# Altium PCB PCB.PcbDoc (part 1 of 2)
Units mm, origin at the board's own origin, x right, y up, seen from the top; angles counter-clockwise.
Board outline 23.1 x 50.44 mm, 2 copper layers (Top Layer, Bottom Layer), stack 1.671 mm thick; 126 components, 44 nets, 357 pads, 87 vias.
Unrouted connection lines stored in the file: 3.
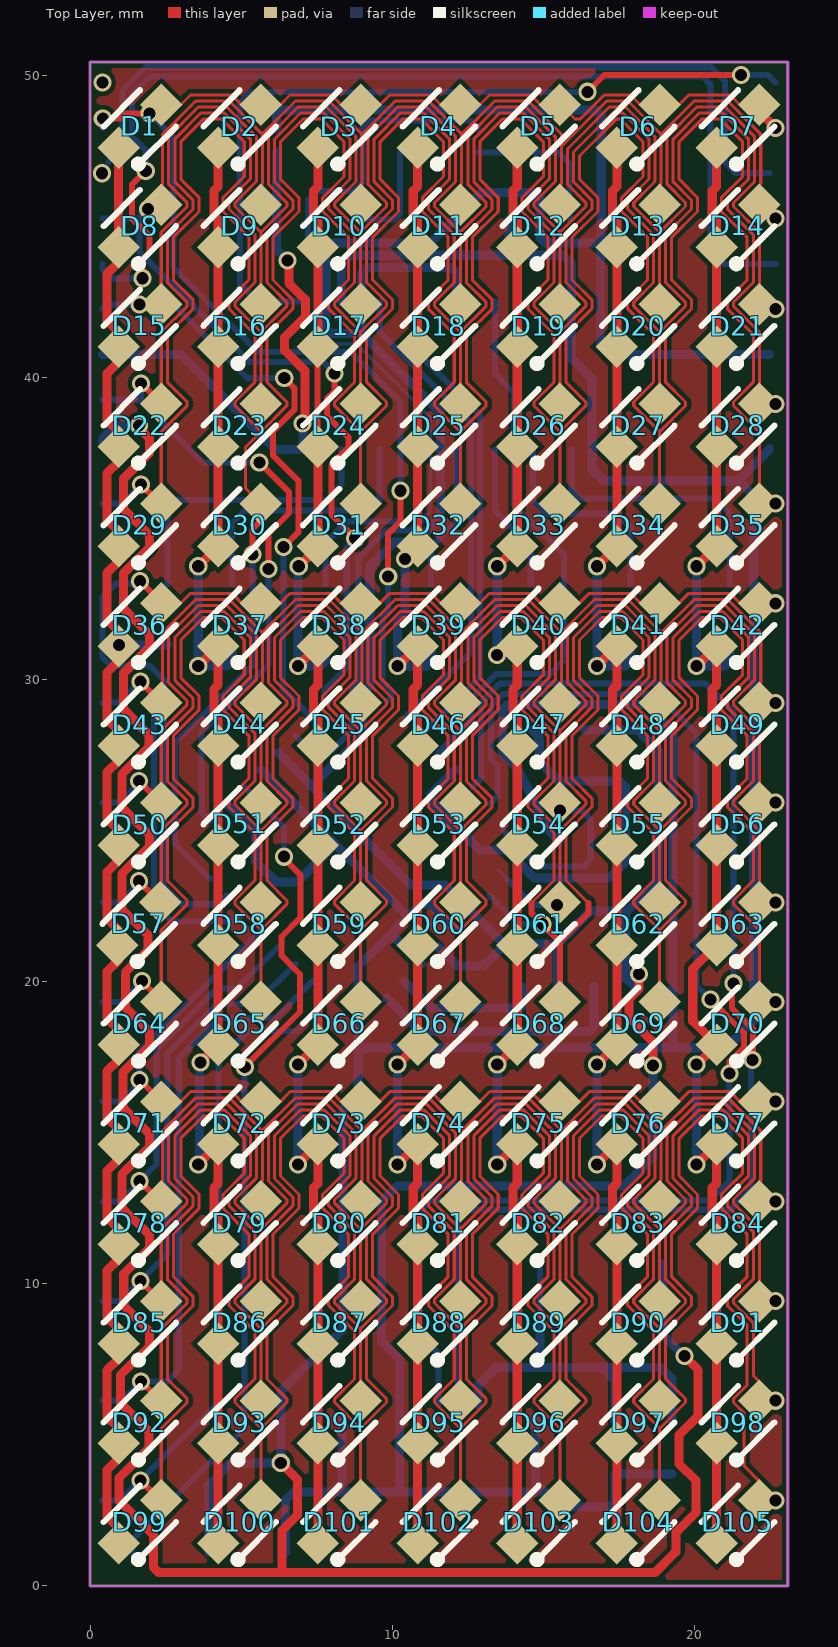
[diagram p0: Top Layer view]
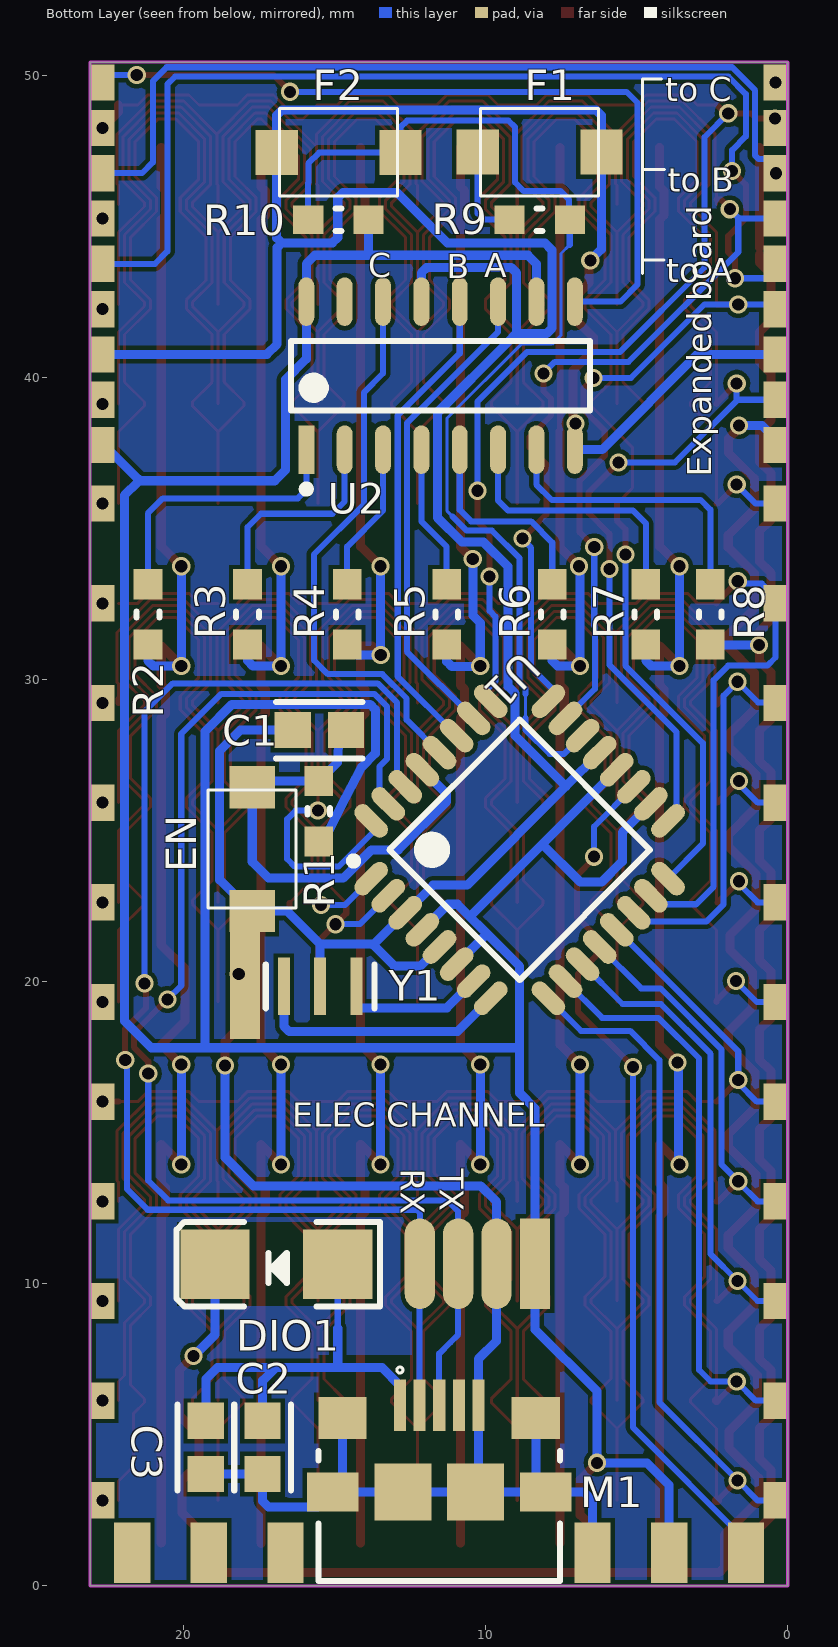
[diagram p1: Bottom Layer view, seen from below]
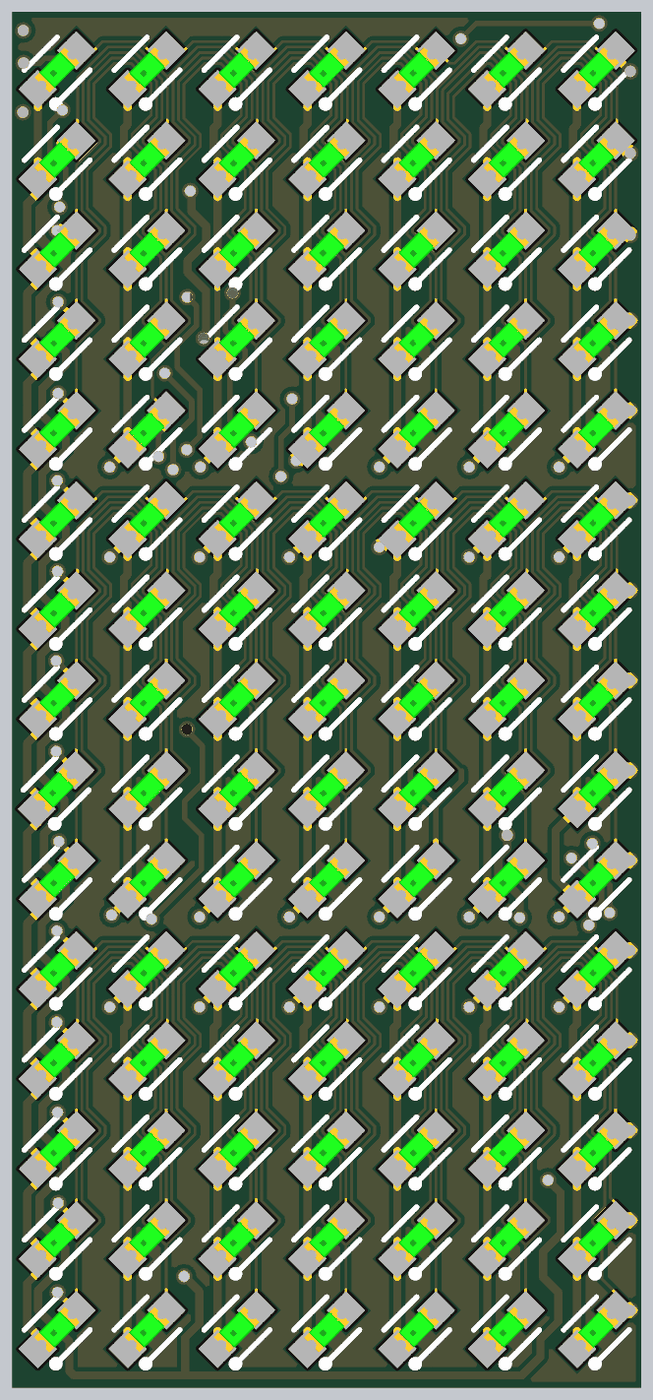
[diagram p3: 3D render of the assembled board from above, using the file's embedded part models]
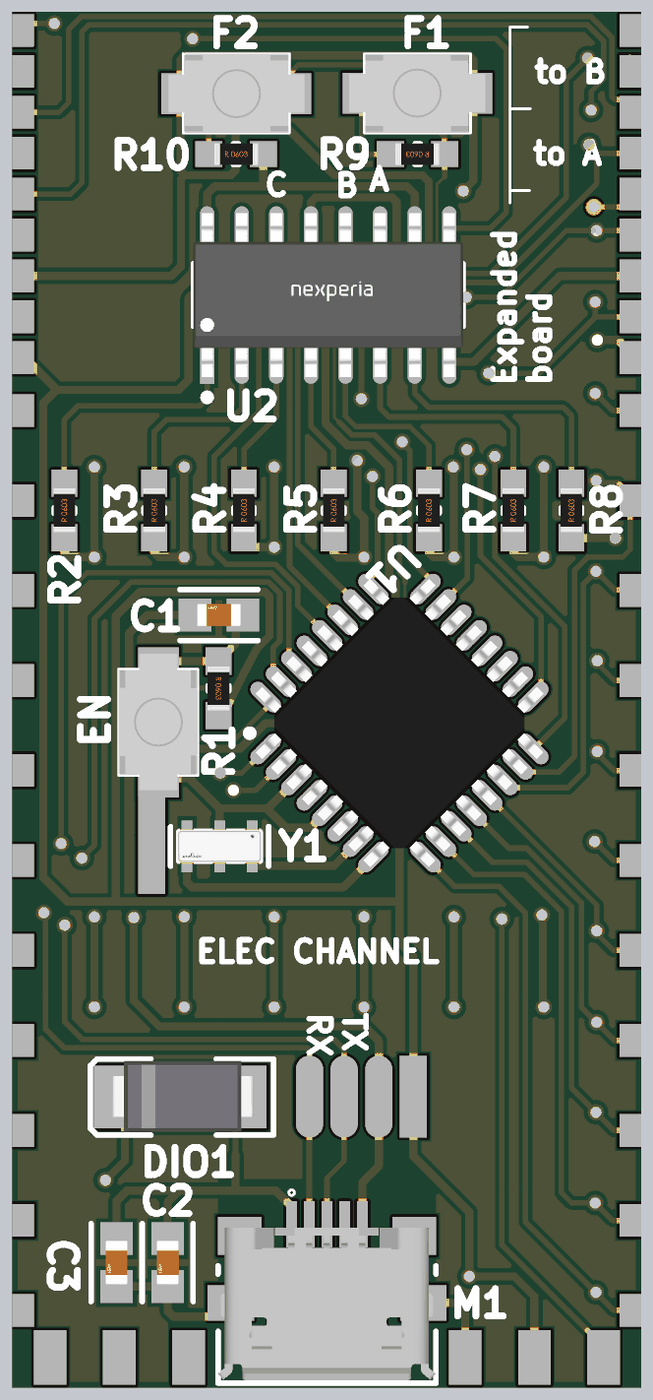
[diagram p4: 3D render of the assembled board from below, using the file's embedded part models]

## Layer stack, top to bottom
Top Solder: solder mask 0.0102, Solder Resist, Dk 3.5
Top Layer: signal copper 0.0356
Dielectric 1: dielectric 1.6, FR-4, Dk 4.8
Bottom Layer: signal copper 0.0356
Bottom Solder: solder mask 0.0102, Solder Resist, Dk 3.5

## Board outline
0,0 0,50.443 23.097,50.443 23.097,0

## Design rules (kind name [scope] priority, off if disabled: settings)
Clearance [All] p1: gap=0.15 ignorepadtopadclearanceinfootprint=FALSE
PolygonConnect [All] p1: connectstyle=Relief reliefconductorwidth=0.254 reliefentries=4 polygonreliefangle="90 Angle" airgapwidth=0.254
RoomDefinition Sheet1 [InComponentClass('Sheet1')] p1: confinementstyle=ConfineIn formatcopy=TRUE lockcomponents=FALSE outline 89.091,-111.853 240.729,-111.853 240.729,-99.153 89.091,-99.153
RoutingCorners [All] p1: cornerstyle=45-Degree minsetback=2 maxsetback=2
RoutingVias [All] p1: holewidth=0.4 width=0.6 viastyle="Through Hole" minholewidth=0.4 minwidth=0.6 maxholewidth=0.4 maxwidth=0.6
SolderMaskExpansion [All] p1: expansion=0.102 istentingtop=FALSE
Width [All] p1: maxlimit=0.5 minlimit=0.1 preferedwidth=0.3
29 further rules are at their usual default settings.

## Components (designator, comment, footprint, x,y, rotation, side; value= is the part's Value field where it differs from the comment)
C1 "0.1uF" Cap_0603_A 15.508,28.329 r0 bottom
C2 "0.1uF" Cap_0603_A 17.387,4.58 r270 bottom
C3 "0.1uF" Cap_0603_A 19.267,4.58 r270 bottom
D1 "Led" "LED 0603" 1.663,48.364 r45 top
D2 "Led" "LED 0603" 4.963,48.364 r45 top
D3 "Led" "LED 0603" 8.263,48.364 r45 top
D4 "Led" "LED 0603" 11.563,48.364 r45 top
D5 "Led" "LED 0603" 14.863,48.364 r45 top
D6 "Led" "LED 0603" 18.163,48.364 r45 top
D7 "Led" "LED 0603" 21.463,48.364 r45 top
D8 "Led" "LED 0603" 1.663,45.064 r45 top
D9 "Led" "LED 0603" 4.963,45.064 r45 top
D10 "Led" "LED 0603" 8.263,45.064 r45 top
D11 "Led" "LED 0603" 11.563,45.064 r45 top
D12 "Led" "LED 0603" 14.863,45.064 r45 top
D13 "Led" "LED 0603" 18.163,45.064 r45 top
D14 "Led" "LED 0603" 21.463,45.064 r45 top
D15 "Led" "LED 0603" 1.663,41.764 r45 top
D16 "Led" "LED 0603" 4.963,41.764 r45 top
D17 "Led" "LED 0603" 8.263,41.764 r45 top
D18 "Led" "LED 0603" 11.563,41.764 r45 top
D19 "Led" "LED 0603" 14.863,41.764 r45 top
D20 "Led" "LED 0603" 18.163,41.764 r45 top
D21 "Led" "LED 0603" 21.463,41.764 r45 top
D22 "Led" "LED 0603" 1.663,38.464 r45 top
D23 "Led" "LED 0603" 4.963,38.464 r45 top
D24 "Led" "LED 0603" 8.263,38.464 r45 top
D25 "Led" "LED 0603" 11.563,38.464 r45 top
D26 "Led" "LED 0603" 14.863,38.464 r45 top
D27 "Led" "LED 0603" 18.163,38.464 r45 top
D28 "Led" "LED 0603" 21.463,38.464 r45 top
D29 "Led" "LED 0603" 1.663,35.164 r45 top
D30 "Led" "LED 0603" 4.963,35.164 r45 top
D31 "Led" "LED 0603" 8.263,35.164 r45 top
D32 "Led" "LED 0603" 11.563,35.164 r45 top
D33 "Led" "LED 0603" 14.863,35.164 r45 top
D34 "Led" "LED 0603" 18.163,35.164 r45 top
D35 "Led" "LED 0603" 21.463,35.164 r45 top
D36 "Led" "LED 0603" 1.663,31.864 r45 top
D37 "Led" "LED 0603" 4.963,31.864 r45 top
D38 "Led" "LED 0603" 8.263,31.864 r45 top
D39 "Led" "LED 0603" 11.563,31.864 r45 top
D40 "Led" "LED 0603" 14.863,31.864 r45 top
D41 "Led" "LED 0603" 18.163,31.864 r45 top
D42 "Led" "LED 0603" 21.463,31.864 r45 top
D43 "Led" "LED 0603" 1.663,28.564 r45 top
D44 "Led" "LED 0603" 4.963,28.564 r45 top
D45 "Led" "LED 0603" 8.263,28.564 r45 top
D46 "Led" "LED 0603" 11.563,28.564 r45 top
D47 "Led" "LED 0603" 14.863,28.564 r45 top
D48 "Led" "LED 0603" 18.163,28.564 r45 top
D49 "Led" "LED 0603" 21.463,28.564 r45 top
D50 "Led" "LED 0603" 1.663,25.264 r45 top
D51 "Led" "LED 0603" 4.963,25.264 r45 top
D52 "Led" "LED 0603" 8.263,25.264 r45 top
D53 "Led" "LED 0603" 11.563,25.264 r45 top
D54 "Led" "LED 0603" 14.863,25.264 r45 top
D55 "Led" "LED 0603" 18.163,25.264 r45 top
D56 "Led" "LED 0603" 21.463,25.264 r45 top
D57 "Led" "LED 0603" 1.624,21.964 r45 top
D58 "Led" "LED 0603" 4.963,21.964 r45 top
D59 "Led" "LED 0603" 8.263,21.964 r45 top
D60 "Led" "LED 0603" 11.563,21.964 r45 top
D61 "Led" "LED 0603" 14.863,21.964 r45 top
D62 "Led" "LED 0603" 18.163,21.964 r45 top
D63 "Led" "LED 0603" 21.463,21.964 r45 top
D64 "Led" "LED 0603" 1.663,18.664 r45 top
D65 "Led" "LED 0603" 4.963,18.664 r45 top
D66 "Led" "LED 0603" 8.263,18.664 r45 top
D67 "Led" "LED 0603" 11.563,18.664 r45 top
D68 "Led" "LED 0603" 14.863,18.664 r45 top
D69 "Led" "LED 0603" 18.163,18.664 r45 top
D70 "Led" "LED 0603" 21.463,18.664 r45 top
D71 "Led" "LED 0603" 1.663,15.364 r45 top
D72 "Led" "LED 0603" 4.963,15.364 r45 top
D73 "Led" "LED 0603" 8.263,15.364 r45 top
D74 "Led" "LED 0603" 11.563,15.364 r45 top
D75 "Led" "LED 0603" 14.863,15.364 r45 top
D76 "Led" "LED 0603" 18.163,15.364 r45 top
D77 "Led" "LED 0603" 21.463,15.364 r45 top
D78 "Led" "LED 0603" 1.663,12.064 r45 top
D79 "Led" "LED 0603" 4.963,12.064 r45 top
D80 "Led" "LED 0603" 8.263,12.064 r45 top
D81 "Led" "LED 0603" 11.563,12.064 r45 top
D82 "Led" "LED 0603" 14.863,12.064 r45 top
D83 "Led" "LED 0603" 18.163,12.064 r45 top
D84 "Led" "LED 0603" 21.463,12.064 r45 top
D85 "Led" "LED 0603" 1.663,8.764 r45 top
D86 "Led" "LED 0603" 4.963,8.764 r45 top
D87 "Led" "LED 0603" 8.263,8.764 r45 top
D88 "Led" "LED 0603" 11.563,8.764 r45 top
D89 "Led" "LED 0603" 14.863,8.764 r45 top
D90 "Led" "LED 0603" 18.163,8.764 r45 top
D91 "Led" "LED 0603" 21.463,8.764 r45 top
D92 "Led" "LED 0603" 1.663,5.464 r45 top
D93 "Led" "LED 0603" 4.963,5.464 r45 top
D94 "Led" "LED 0603" 8.263,5.464 r45 top
D95 "Led" "LED 0603" 11.563,5.464 r45 top
D96 "Led" "LED 0603" 14.863,5.464 r45 top
D97 "Led" "LED 0603" 18.163,5.464 r45 top
D98 "Led" "LED 0603" 21.463,5.464 r45 top
D99 "Led" "LED 0603" 1.663,2.164 r45 top
D100 "Led" "LED 0603" 4.963,2.164 r45 top
D101 "Led" "LED 0603" 8.263,2.164 r45 top
D102 "Led" "LED 0603" 11.563,2.164 r45 top
D103 "Led" "LED 0603" 14.863,2.164 r45 top
D104 "Led" "LED 0603" 18.163,2.164 r45 top
D105 "Led" "LED 0603" 21.463,2.164 r45 top
DIO1 "Diode SMD" DIO-SMD-106 16.93,10.651 r180 bottom value=1N5007
EN "BUTTON" "BUTTON 3x4mm 2 Pin" 17.768,24.392 r90 bottom
F1 "BUTTON" "BUTTON 3x4mm 2 Pin" 8.217,47.431 r0 bottom
F2 "BUTTON" "BUTTON 3x4mm 2 Pin" 14.872,47.491 r180 bottom
M1 "Micro-USB" "2.0 5 PIN SMD" 11.088,3.784 r180 bottom
R1 "10k" Res_0603 15.533,25.612 r270 bottom
R2 "10k" Res_0603 21.172,32.19 r90 bottom
R3 "10k" Res_0603 17.875,32.19 r90 bottom
R4 "10k" Res_0603 14.578,32.19 r90 bottom
R5 "10k" Res_0603 11.281,32.19 r90 bottom
R6 "10k" Res_0603 7.786,32.19 r90 bottom
R7 "10k" Res_0603 4.687,32.19 r90 bottom
R8 "10k" Res_0603 2.554,32.19 r90 bottom
R9 "10k" Res_0603 8.243,45.24 r0 bottom
R10 "10k" Res_0603 14.847,45.22 r180 bottom
U1 "ATmega328-AU" TQFP32 8.878,24.367 r135 bottom
U2 "74HC595D,118" FP-SOT109-1-IPC_C 11.494,40.064 r90 bottom
Y1 "CSTNE16M0V530000R0" FP-CSTNE16M0V530000R0-MFG 15.482,19.846 r180 bottom

## Footprints (in the part's own frame and the unit in brackets; to place one, negate y for a bottom-side part, rotate by r counter-clockwise, add the part's x,y. Pads: shape width x height; smd on the part's side, far side on the other; paste and mask are expansions set on the pad)
"2.0 5 PIN SMD" [mm] "ID 1981568-1"
  rect 0.4x1.7 smd: 1(-1.751,2.198) 2(-1.101,2.198) 3(-0.451,2.198) 4(0.199,2.198) 5(0.849,2.198)
  rect 1.6x1.4 smd: 6(-3.651,1.773) 7(2.749,1.773)
  rect 1.7x1.3 smd: 8(-3.98,-0.68) 9(3.08,-0.68)
  rect 1.9x1.9 smd: 10(-1.651,-0.677) 11(0.749,-0.677)
  silkscreen extent -4.45,-3.63 3.55,3.46, body extent -4.46,-3.52 3.54,2.08, height 2.94
"BUTTON 3x4mm 2 Pin" [mm]
  rect 1.4x1.5 smd: 1(-2.05,-0.04) 2(2.05,-0.04)
  silkscreen extent -1.95,-1.48 1.95,1.42, body extent -2.49,-1.48 2.51,1.42, height 2
Cap_0603_A [mm]
  rect 1.2x1.2 smd paste+0 mask+0: 1(-0.88,0) 2(0.88,0)
  silkscreen extent -1.43,-0.93 1.43,0.93, body extent -0.8,-0.41 0.8,0.4, height 0.9
DIO-SMD-106 [mil]
  rect 90x90.55 smd: 1(80,0) 2(-80,0)
  silkscreen extent -130,-55 135,55, body extent -99,-50 106,52, height 95
FP-CSTNE16M0V530000R0-MFG [mm]
  rect 0.4x1.9 smd paste+0 mask+0: 1(1.2,0) 2(0,0) 3(-1.2,0)
  silkscreen extent -1.8,-0.72 1.8,0.72, body extent -1.6,-0.65 1.6,0.65, height 1
FP-SOT109-1-IPC_C [mm]
  rect 1.604x0.528 smd paste+0 mask+0: 1(-2.451,4.445)
  rrect100% 1.604x0.528 smd paste+0 mask+0: 2(-2.451,3.175) 3(-2.451,1.905) 4(-2.451,0.635) 5(-2.451,-0.635) 6(-2.451,-1.905) 7(-2.451,-3.175) 8(-2.451,-4.445) 9(2.451,-4.445) 10(2.451,-3.175) 11(2.451,-1.905) 12(2.451,-0.635) 13(2.451,0.635) 14(2.451,1.905) 15(2.451,3.175) 16(2.451,4.445)
  silkscreen extent -3.88,-4.95 1.15,4.95, body extent -3,-4.95 3,4.95, height 1.75
"LED 0603" [mm]
  rect 1x1 smd: 1(-1.04,-0.02) 2(0.96,-0.02)
  silkscreen extent -1.08,-0.99 0.8,0.82, body extent -1.29,-0.57 1.21,0.53, height 0.25
Res_0603 [mm]
  rect 1x0.95 smd: 1(-1.03,0.01) 2(0.97,0.01)
  silkscreen extent -0.13,-0.37 0.07,0.39, body extent -0.82,-0.39 0.78,0.41, height 0.45
TQFP32 [mm] "Thin QFP, 32-Leads, Body 9x9mm, Pitch 0.8mm, IPC Low Density"
  oval 1.35x0.55 smd: 1(-4.15,2.8) 2(-4.15,2) 3(-4.15,1.2) 4(-4.15,0.4) 5(-4.15,-0.4) 6(-4.15,-1.2) 7(-4.15,-2) 8(-4.15,-2.8) 17(4.15,-2.8) 18(4.15,-2) 19(4.15,-1.2) 20(4.15,-0.4) 21(4.15,0.4) 22(4.15,1.2) 23(4.15,2) 24(4.15,2.8)
  oval 0.55x1.35 smd: 9(-2.8,-4.15) 10(-2,-4.15) 11(-1.2,-4.15) 12(-0.4,-4.15) 13(0.4,-4.15) 14(1.2,-4.15) 15(2,-4.15) 16(2.8,-4.15) 25(2.8,4.15) 26(2,4.15) 27(1.2,4.15) 28(0.4,4.15) 29(-0.4,4.15) 30(-1.2,4.15) 31(-2,4.15) 32(-2.8,4.15)
  silkscreen extent -4.27,-3.05 3.05,3.75, body extent -4.5,-4.5 4.5,4.5, height 1.4

## Part data
C1 C2 C3: library part Capacitor, "General Purpose Ceramic Capacitor, 0603, 1nF, 10%, X7R, 15%, 50V", Capacitance=1nF, Case Code (Imperial)=0603, Case Code (Metric)=1608, Dielectric=X7R, Dielectric Material=Ceramic, Max Operating Temperature=125°C, Min Operating Temperature=-55°C, Package Quantity=4000, Tolerance=10%, Voltage=50V, Case/Package=0603, Construction=Flat, Contact Plating=Tin, Depth=0.81mm, Height=0.9mm, Lead Free="Lead Free", Length=1.6mm, Mount="Surface Mount", Number of Pins=2, Packaging="Tape and Reel", Radiation Hardening=No, REACH SVHC="No SVHC", RoHS Compliant=Yes, Series=-, Termination=SMD/SMT, Thickness=0.035inch, Voltage Rating=50V, Voltage Rating (DC)=50V, Weight=7.1E-05oz, Width=0.032inch
DIO1: "Default Diode", Code - JEDEC=DO-214-AB, Published=8-Jun-2000, Publisher="Altium Limited", Revision="July-2002: Re-released for DXP Platform."
EN F1 F2: library part "BUTTON 4 PIN", Case/Package=SOIC, Frequency=100kHz, High Level Output Current=-200mA, Low Level Output Current=200mA, Max Operating Temperature=70°C, Max Supply Voltage=16V, Min Operating Temperature=0°C, Min Supply Voltage=4.5V, Operating Supply Current=10mA, Package Quantity=2500, Quiescent Current=15mA, Contact Plating=Gold, Height=1.58mm, Lead Free="Lead Free", Length=4.9mm, Mount="Surface Mount", Number of Pins=8, Number of Timers/Counters=1, Packaging="Tape and Reel", Radiation Hardening=No, REACH SVHC="No SVHC", Weight=0.002561oz, Width=3.91mm
R1 R2 R3 R4 R5 R6 R7 R8 R9 R10: library part Resistor
U1: "8-bit AVR Microcontroller, 32KB Flash, 1KB EEPROM, 2KB SRAM, 32-pin TQFP, Industrial Grade (-40°C to 85°C)", Supplier Part Number 1=ATMEGA328-AU-ND, Code_JEDEC=MS-026-ABA, ComponentLink1Description="Manufacturer Link", ComponentLink1URL=http://www.atmel.com/products/avr/default.asp?, ComponentLink2Description="ATmega48A/48PA/88A/88PA/168A/168PA/328/328P Datasheet", ComponentLink2URL=http://www.atmel.com/dyn/resources/prod_documents/8271.pdf, ComponentLink3Description="ATmega48A/48PA/88A/88PA/168A/168PA/328/328P Summary", ComponentLink3URL=http://www.atmel.com/dyn/resources/prod_documents/8271S.pdf, ComponentLink4Description="Atmel.com Home", ComponentLink4URL=http://www.atmel.com, DatasheetVersion="revA, Jan-2010", PackageDescription="32-Lead, 7x7x1.0 mm Body, 0.8mm Lead Pitch, Thin Profile Plastic Quad Flat Package (TQFP)", PackageReference=32A, PackageVersion="revB, Oct-2001", Published=1-Apr-2010, Publisher="Altium Limited", Supplier 1=Digi-Key, Supplier 2=Mouser, Supplier Part Number 2=556-ATMEGA328-AU
U2: library part CMP-14351-000006-1, "IC SHIFT REGISTER 8BIT 16SOIC", RoHS Compliant=Yes
Y1: library part CMP-06054-000001-1, "CERAMIC RES 16.0000MHZ 15PF SMD", Frequency=16MHz, Load Capacitance=15pF, Manufacturer=Murata, Package=0, Temperature="-40°C to +85°C", Temperature Range High=+85°C, Temperature Range Low=-40°C, Tolerance=0.5%, Automotive=No, Category=Crys, ComponentLink2Description=Datasheet, ComponentLink2URL=https://www.murata.com/en-sg/products/productdata/8801162231838/SPEC-CSTNE16M0V530000R0.pdf?1545967809000, Device Class L1="Passive Components", Device Class L2="Crystals / Oscillators", Device Class L3=Crystals, Digikey Description="CERAMIC RES 16.0000MHZ 15PF SMD", Esr=40Ω, Height=1mm, Lead Free=Yes, Manufacturer Part Number=CSTNE16M0V530000R0, Mouser Description="Ceramic Resonator 16MHz ±0.5% (Tol) ±0.3% (Stability) 15pF 40Ohm 3-Pin CSMD T/R", Octopart=https://octopart.com/cstne16m0v530000r0-murata-91406924, RoHS=TRUE, Series=CSTNE_V, Stability=0.3%

## Free pads (board coordinates)
  rect 0.8x1.2 smd far side: ""(0.405,9.428) ""(0.405,25.928) ""(0.405,29.228) ""(0.405,6.128) ""(0.405,12.728) ""(0.405,16.028) ""(0.405,19.328) ""(0.405,22.628) ""(0.405,32.528) ""(0.405,35.828) ""(0.405,37.767) ""(0.405,39.267) ""(0.405,40.767) ""(0.405,42.267) ""(0.405,43.767) ""(0.405,45.267) ""(0.405,46.767) ""(0.405,48.267) ""(0.405,49.767) ""(0.405,2.828) ""(22.693,2.828) ""(22.693,6.128) ""(22.693,12.728) ""(22.693,16.028) ""(22.693,19.328) ""(22.693,22.628) ""(22.693,32.528) ""(22.693,35.828) ""(22.693,37.767) ""(22.693,39.267) ""(22.693,40.767) ""(22.693,42.267) ""(22.693,43.767) ""(22.693,45.267) ""(22.693,46.767) ""(22.693,48.267) ""(22.693,49.767) ""(22.693,9.428) ""(22.693,25.928) ""(22.693,29.228)
  rect 1.2x2 smd far side: ""(1.385,1.101) ""(3.925,1.101) ""(6.465,1.101) ""(16.625,1.101) ""(19.165,1.101) ""(21.705,1.101)
  rect 1x3 smd far side: ""(8.37,10.665)
  oval 1x3 smd far side: ""(9.64,10.665) ""(10.91,10.665) ""(12.18,10.665)
  rect 1x3.6 smd far side: ""(17.971,19.897)

## Via types
v1: diameter 0.6, hole 0.4, Top Layer to Bottom Layer, tented both sides, 86 vias
v2: diameter 0.6, hole 0.4, Top Layer to Bottom Layer, tented top, 1 vias

## Nets (pads, with @x,y where several pads share a name; then routed paths per layer and width w, separated by ;. In a path a pad name is that pad's centre, name@x,y a point inside that pad or via, vN(x,y) a via of type N, cw(c..) or ccw(c..) an arc to the next point about the centre after c; other vN are vias at no path point)
+5: DIO1.2 pad.@0.405,37.767 pad.@3.925,1.101 pad.@8.37,10.665 pad.@22.693,37.767 R1.2 R10.2 U1.4 U1.6 U1.18 U1.20 U2.10 U2.16 | length 197.8
  Top Layer w0.3: v1(1.614,38.413) 1.614,38.332 1.968,37.978 1.968,37.513 1.106,36.651 1.106,35.645 1.969,34.781 1.969,34.382 1.106,33.518 1.106,32.352 1.969,31.488 1.969,31.082 1.106,30.218 1.106,29.022 1.944,28.184 1.944,27.756 1.055,26.867 1.055,25.77 1.969,24.856 1.969,24.482 1.055,23.567 1.055,22.405 1.919,21.541 1.919,21.065 1.165,20.312 1.165,19.151 1.969,18.347 1.969,17.882 1.089,17.001 1.089,15.827 1.969,14.947 1.969,14.537 1.055,13.623 1.055,12.522 1.969,11.608 1.969,11.184 1.115,10.33 1.115,9.271 1.969,8.416 1.969,7.933 1.004,6.968 1.004,6.054 1.944,5.114 1.944,4.555 0.953,3.564 0.953,2.828 2.096,1.685 2.096,0.616 2.272,0.44 6.349,0.44 ; v1(6.313,4.072) 6.872,3.514 6.872,2.345 6.349,1.822 6.349,0.44 ; v1(19.673,7.603) 20.13,7.146 20.13,5.622 19.495,4.987 19.495,4.047 20.054,3.488 20.054,2.421 19.394,1.761 19.394,1.126 18.708,0.44 6.349,0.44
  Bottom Layer w0.3: pad.@0.405,37.767 0.405,37.967 0.851,38.413 v1(1.614,38.413) ; pad.@3.925,1.101 3.925,3.336 4.662,4.072 v1(6.313,4.072) 6.313,6.435 8.37,8.492 pad.@8.37,10.665 8.37,15.807 8.878,16.315 8.878,17.814 ; U1.18@4.53,25.887 5.475,24.942 5.475,23.986 6.16,23.3 6.864,23.3 8.122,24.558 ; U1.20@5.661,27.019 8.122,24.558 ; U2.10@8.319,42.515 8.319,43.767 8.604,44.052 13.892,44.052 ; 10.084,21.464 U1.6@10.964,20.584 ; U1.4@12.096,21.715 11.247,22.564 10.936,22.564 10.51,22.138 ; R10.2@13.877,45.23 13.877,44.067 13.892,44.052 ; R1.2@15.523,24.642 15.198,24.992 14.642,26.097 14.111,27.102 13.653,27.56 13.653,29.004 13.829,29.179 18.399,29.179 19.292,28.286 19.292,17.814 ; DIO1.2@18.962,10.651 18.962,8.314 v1(19.673,7.603) ; pad.@22.493,37.628 21.502,36.638 21.502,36.584 ; 8.122,24.558 10.51,22.17 10.51,22.138 ; 8.878,17.814 8.878,20.506 10.084,21.712 10.51,22.138 ; 8.878,17.814 19.292,17.814 ; 13.892,44.052 15.655,44.052 15.939,43.767 U2.16@15.939,42.515 15.939,40.623 16.625,39.937 16.625,36.943 16.983,36.584 21.502,36.584 ; 19.292,17.814 21.07,17.814 21.959,18.703 21.959,36.102 21.502,36.559 21.502,36.584
C1: D1.1 D8.1 D15.1 D22.1 D29.1 D36.1 D43.1 D50.1 D57.1 D64.1 D71.1 D78.1 D85.1 D92.1 D99.1 R8.1 | length 51.8
  Top Layer w0.3: D99.1@0.941,1.414 0.941,1.909 0.553,2.297 0.553,3.831 0.941,4.219 D92.1@0.941,4.714 0.941,5.209 0.553,5.597 0.553,7.131 0.941,7.519 D85.1@0.941,8.014 0.941,8.509 0.553,8.897 0.553,10.431 0.941,10.819 D78.1@0.941,11.314 0.941,11.809 0.553,12.197 0.553,13.731 0.941,14.119 D71.1@0.941,14.614 0.941,15.109 0.553,15.497 0.553,17.031 0.941,17.419 D64.1@0.941,17.914 0.941,18.409 0.553,18.797 0.553,20.331 0.941,20.719 0.941,21.214 0.941,21.709 0.553,22.097 0.553,23.631 0.941,24.019 D50.1@0.941,24.514 0.941,25.009 0.553,25.397 0.553,26.931 0.941,27.319 D43.1@0.941,27.814 0.941,28.309 0.553,28.697 0.553,30.231 0.941,30.619 D36.1@0.941,31.114 ; D8.1@0.941,44.067 0.941,43.819 0.553,43.431 0.553,41.897 0.941,41.509 D15.1@0.941,41.014 0.941,40.519 0.553,40.131 0.553,38.597 0.941,38.209 D22.1@0.941,37.714 0.941,37.219 0.553,36.831 0.553,35.297 0.941,34.909 D29.1@0.941,34.414 0.941,33.919 0.553,33.531 0.553,31.997 0.941,31.609 D36.1@0.941,31.114 ; D8.1@0.941,44.314 D1.1@0.941,47.614 ; v1(0.953,31.149) 0.941,31.137 D36.1@0.941,31.114
  Bottom Layer w0.3: v1(0.953,31.149) 2.552,31.149 R8.1@2.564,31.16
C2: D2.1 D9.1 D16.1 D23.1 D30.1 D37.1 D44.1 D51.1 D58.1 D65.1 D72.1 D79.1 D86.1 D93.1 D100.1 R7.1 | length 52
  Top Layer w0.3: v1(3.58,13.953) D72.1@4.241,14.614 4.241,13.319 4.099,13.176 4.099,12.376 4.241,12.233 D79.1@4.241,11.314 D86.1@4.241,8.014 D93.1@4.241,4.714 D100.1@4.241,1.414 ; v1(3.58,30.453) D37.1@4.241,31.114 4.241,29.824 4.099,29.681 4.099,28.876 4.241,28.733 D44.1@4.241,27.814 D51.1@4.241,24.514 D58.1@4.241,21.214 D65.1@4.241,17.917 ; v1(3.58,33.755) D30.1@4.239,34.414 ; v1(3.651,17.326) D65.1@4.241,17.914 D65.1@4.241,17.914 ; D30.1@4.241,34.414 D30.1@4.239,34.414 ; D2.1@4.241,47.614 4.241,46.324 4.099,46.181 4.099,45.376 4.241,45.233 D9.1@4.241,44.314 D16.1@4.241,41.014 D23.1@4.241,37.714 4.241,34.417 D30.1@4.239,34.414
  Bottom Layer w0.3: v1(3.58,13.953) 3.616,13.988 3.616,17.291 v1(3.651,17.326) ; v1(3.58,33.755) v1(3.58,30.453) 4.522,30.453 4.697,30.629 R7.1@4.697,31.16
C3: D3.1 D10.1 D17.1 D24.1 D31.1 D38.1 D45.1 D52.1 D59.1 D66.1 D73.1 D80.1 D87.1 D94.1 D101.1 R6.1 | length 52.8
  Top Layer w0.2: D24.1@7.541,37.714 7.541,38.28 7.532,38.289 7.532,40.439 7.541,40.449 D17.1@7.541,41.014
  Top Layer w0.3: v1(6.88,17.255) D66.1@7.539,17.914 ; v1(6.88,13.953) D73.1@7.541,14.614 7.541,13.324 7.399,13.181 7.399,12.376 7.541,12.233 D80.1@7.541,11.314 7.541,10.819 D94.1@7.542,4.714 D101.1@7.541,1.417 ; v1(6.88,30.453) D38.1@7.541,31.114 7.541,29.824 7.399,29.681 7.399,28.876 7.541,28.733 D45.1@7.542,27.814 D52.1@7.541,24.514 D59.1@7.541,21.214 7.541,17.917 D66.1@7.539,17.914 ; v1(6.906,33.755) 7.541,34.39 D31.1@7.541,34.414 7.541,37.724 D24.1@7.541,38.209 ; D66.1@7.541,17.914 D66.1@7.539,17.914 ; D17.1@7.541,40.519 7.541,41.005 D10.1@7.541,44.314 7.541,45.233 7.399,45.376 7.399,46.181 7.541,46.324 D3.1@7.541,47.614 ; D101.1@7.541,1.417 D101.1@7.541,1.414 7.539,1.414 D101.1@7.541,1.417
  Bottom Layer w0.3: v1(6.88,13.953) v1(6.88,17.255) ; v1(6.906,33.755) 6.88,33.729 v1(6.88,30.453) 7.62,30.453 7.796,30.629 R6.1@7.796,31.16
C4: D4.1 D11.1 D18.1 D25.1 D32.1 D39.1 D46.1 D53.1 D60.1 D67.1 D74.1 D81.1 D88.1 D95.1 D102.1 R5.1 | length 83.7
  Top Layer w0.1: v1(10.18,17.255) D67.1@10.839,17.914 ; D102.1@10.842,1.414 10.841,12.375 10.799,12.418 10.799,13.176 10.841,13.219 D74.1@10.841,14.614 ; D67.1@10.841,17.914 D60.1@10.841,21.214 D53.1@10.841,24.514 D46.1@10.841,27.814 10.841,28.875 10.799,28.918 10.799,29.676 10.841,29.719 D39.1@10.841,31.114
  Top Layer w0.3: v1@10.177,17.255 D67.1@10.836,17.914 ; v1(10.18,13.953) D74.1@10.841,14.614 10.841,13.324 10.699,13.181 10.699,12.376 10.841,12.233 10.841,1.417 10.839,1.414 D102.1@10.842,1.414 ; v1(10.18,17.255) D67.1@10.839,17.914 ; v1(10.18,30.453) D39.1@10.841,31.114 10.841,29.824 10.699,29.681 10.699,28.876 10.841,28.733 10.841,17.917 D67.1@10.839,17.914 ; v1(10.428,33.994) 10.841,34.407 D32.1@10.841,34.417 ; D67.1@10.841,17.914 D67.1@10.839,17.914 ; D32.1@10.841,34.414 D25.1@10.841,37.714 D18.1@10.841,41.014 D11.1@10.841,44.314 10.841,45.233 10.699,45.376 10.699,46.181 10.841,46.324 D4.1@10.841,47.614
  Bottom Layer w0.1: v1@10.18,13.953 v1(10.18,17.255)
  Bottom Layer w0.3: v1@10.177,13.953 v1@10.177,17.255 ; v1(10.428,33.994) 10.428,32.129 10.18,31.881 10.18,30.453 10.203,30.43 11.115,30.43 11.291,30.606 R5.1@11.291,31.16
C5: D5.1 D12.1 D19.1 D26.1 D33.1 D40.1 D47.1 D54.1 D61.1 D68.1 D75.1 D82.1 D89.1 D96.1 D103.1 R4.1 | length 81.4
  Top Layer w0.1: v1(13.48,17.255) D68.1@14.139,17.914 ; v1(13.48,33.755) D33.1@14.139,34.414 ; D68.1@14.142,17.914 D47.1@14.142,27.814 14.142,28.875 14.099,28.918 14.099,29.676 14.142,29.719 14.142,29.824 ; D33.1@14.141,34.414 D12.1@14.142,44.314 14.142,45.375 14.099,45.418 14.099,46.176 14.142,46.219 D5.1@14.142,47.614
  Top Layer w0.3: v1(13.476,30.819) 13.771,31.114 D40.1@14.142,31.114 14.142,29.824 13.999,29.681 13.999,28.876 14.142,28.733 D47.1@14.142,27.814 14.142,17.917 14.139,17.914 D68.1@14.142,17.914 ; v1@13.478,17.256 D68.1@14.138,17.916 ; v1(13.48,33.755) D33.1@14.139,34.414 ; v1(13.48,13.953) D75.1@14.142,14.614 14.142,13.319 13.999,13.176 13.999,12.376 14.142,12.233 D82.1@14.142,11.314 D89.1@14.142,8.014 D96.1@14.142,4.714 D103.1@14.142,1.414 ; D33.1@14.141,34.414 D33.1@14.139,34.414 ; D5.1@14.142,47.614 14.142,46.324 13.999,46.181 13.999,45.376 14.142,45.233 D12.1@14.142,44.314 14.142,34.417 D33.1@14.139,34.414
  Bottom Layer w0.1: v1(13.48,13.953) v1(13.48,17.255)
  Bottom Layer w0.3: v1@13.479,13.955 v1@13.479,17.256 ; v1(13.48,33.755) 13.48,30.823 v1(13.476,30.819) 14.263,30.819 14.588,31.144 R4.1@14.588,31.16
C6: D6.1 D13.1 D20.1 D27.1 D34.1 D41.1 D48.1 D55.1 D62.1 D69.1 D76.1 D83.1 D90.1 D97.1 D104.1 R3.1 | length 70.4
  Top Layer w0.1: v1(16.78,33.755) D34.1@17.439,34.414 ; D34.1@17.442,34.414 D27.1@17.442,37.714 D20.1@17.442,41.014 D13.1@17.442,44.314 17.442,45.375 17.399,45.418 17.399,46.176 17.442,46.219 D6.1@17.442,47.614
  Top Layer w0.3: v1@16.777,17.255 D69.1@17.436,17.914 ; v1(16.78,13.953) D76.1@17.442,14.614 17.442,13.324 17.299,13.181 17.299,12.376 17.442,12.233 D83.1@17.442,11.314 D90.1@17.442,8.014 D97.1@17.442,4.714 D104.1@17.442,1.417 ; v1(16.78,17.255) D69.1@17.439,17.914 ; v1(16.78,30.453) D41.1@17.442,31.114 17.442,29.772 ; v1(16.78,33.755) D34.1@17.439,34.414 ; 17.415,29.798 17.299,29.681 17.299,28.876 17.442,28.733 D48.1@17.442,27.814 D55.1@17.442,24.514 D62.1@17.442,21.214 D69.1@17.442,17.917 ; D104.1@17.442,1.409 D104.1@17.442,1.414 ; D34.1@17.442,34.414 D34.1@17.439,34.414 ; D6.1@17.442,47.614 17.442,46.324 17.299,46.181 17.299,45.376 17.442,45.233 D13.1@17.442,44.314 D20.1@17.442,41.014 D27.1@17.442,37.714 17.442,34.417 D34.1@17.439,34.414 ; D69.1@17.439,17.914 D69.1@17.442,17.917 ; D69.1@17.439,17.914 D69.1@17.442,17.914 D69.1@17.442,17.917 ; D104.1@17.442,1.414 D104.1@17.442,1.417 ; D104.1@17.442,1.414 17.439,1.414 D104.1@17.442,1.417
  Bottom Layer w0.1: v1(16.78,13.953) v1(16.78,17.255)
  Bottom Layer w0.3: v1@16.777,13.953 v1@16.777,17.255 ; v1(16.78,33.755) v1(16.78,30.453) 17.709,30.453 17.885,30.629 R3.1@17.885,31.16
C7: D7.1 D14.1 D21.1 D28.1 D35.1 D42.1 D49.1 D56.1 D63.1 D70.1 D77.1 D84.1 D91.1 D98.1 D105.1 R2.1 | length 58
  Top Layer w0.1: 20.742,28.733 20.742,28.875 20.699,28.918 20.699,29.676 20.742,29.719 20.742,29.824
  Top Layer w0.3: v1@20.077,33.755 D35.1@20.736,34.414 ; v1(20.08,17.255) 20.739,17.914 19.953,18.7 19.953,20.425 D63.1@20.742,21.214 D56.1@20.742,24.514 D49.1@20.742,27.814 20.742,28.733 20.599,28.876 20.599,29.681 20.742,29.824 D42.1@20.742,31.114 v1(20.08,30.453) ; v1(20.08,33.755) D35.1@20.739,34.414 ; v1(20.08,13.953) D77.1@20.742,14.614 20.742,13.324 20.599,13.181 20.599,12.376 20.742,12.233 D84.1@20.742,11.314 D91.1@20.742,8.014 D98.1@20.742,4.714 20.742,1.909 D105.1@20.742,1.414 ; D7.1@20.742,47.614 20.742,46.324 20.599,46.181 20.599,45.376 20.742,45.233 D14.1@20.742,44.314 D21.1@20.742,41.014 D28.1@20.742,37.714 ; D35.1@20.739,34.414 D35.1@20.742,34.414 D28.1@20.742,37.714 ; D35.1@20.739,34.414 20.742,34.417 D28.1@20.742,37.714
  Bottom Layer w0.3: v1@20.077,13.953 v1@20.077,17.255 ; v1@20.077,30.453 v1@20.077,33.755 ; v1(20.08,30.453) 21.006,30.453 21.182,30.629 R2.1@21.182,31.16
CLK: pad.@0.405,43.767 pad.@22.693,43.767 U1.26 U2.11 | length 51.8
  Top Layer w0.2: v2(1.741,43.29) 1.741,43.928 1.969,44.157 1.969,44.687 1.385,45.271 1.385,46.389 v1(1.842,46.846)
  Bottom Layer w0.2: pad.@0.405,43.767 0.405,43.59 0.705,43.29 v2(1.741,43.29) ; v1(1.842,46.846) 1.842,47.532 1.385,47.989 1.385,49.386 1.969,49.97 20.283,49.97 20.537,49.716 20.537,44.179 20.949,43.767 pad.@22.693,43.767 ; U2.11@9.589,42.515 9.589,41.512 12.612,38.489 12.612,30.929 U1.26@10.399,28.716
DATA: pad.@0.405,49.767 U1.28 U2.14 | length 18.7
  Bottom Layer w0.2: U1.28@11.53,27.584 12.619,28.673 12.619,29.378 13.425,30.184 15.228,30.184 15.685,30.641 15.685,34.146 14.034,35.797 14.034,39.505 13.399,40.14 U2.14@13.399,42.515
  other v1: 0.405,49.767
EN: C1.1 EN.2 R1.1 U1.29 | length 15.9
  Bottom Layer w0.3: U1.29@12.096,27.019 11.292,26.215 11.292,25.967 12.891,24.367 13.78,24.367 14.72,23.427 17.184,23.427 17.728,23.971 EN.2@17.728,26.442 17.529,26.642 R1.1@15.523,26.642 15.198,26.967 14.914,27.251 ccw(c14.702,27.039) 14.913,27.252 14.853,28.113 14.77,28.196 14.766,28.2 C1.1@14.628,28.329
F3: pad.@1.385,1.101 U1.19 | length 28.9
  Top Layer w0.2: v1(5.119,17.179) 6.948,19.008 6.948,20.252 6.338,20.862 6.338,21.497 6.973,22.132 6.973,23.529 6.414,24.088 v1(6.414,24.138)
  Bottom Layer w0.2: pad.@1.385,1.101 1.385,1.501 5.119,5.234 v1(5.119,17.179) ; U1.19@5.095,26.453 6.414,25.134 v1(6.414,24.138)
GND: C1.2 C2.2 C3.2 EN.1 F1.1 F2.1 M1.5 M1.6 M1.7 M1.8 M1.9 M1.10 M1.11 pad.@0.405,40.767 pad.@6.465,1.101 pad.@9.64,10.665 pad.@17.971,19.897 pad.@22.693,40.767 U1.3 U1.5 U1.21 U2.8 U2.13 Y1.2 | length 160.2
  Top Layer w0.3: v1(6.537,43.879) 6.582,43.834 6.582,43.129 7.126,42.585 7.126,42.02 6.44,41.334 6.44,40.902 7.115,40.228 7.115,38.796 7.089,38.7 v1(7.032,38.48) ; v1(18.175,20.252) 18.175,19.77 17.844,19.439 17.844,18.804 18.632,18.017 v1(18.632,17.23)
  Bottom Layer w0.3: pad.@0.405,40.767 2.994,40.767 6.148,37.613 U2.8@7.049,37.613 v1@7.049,38.48 ; F1.1@6.167,47.471 6.167,44.249 v1(6.537,43.879) ; 6.168,48.232 6.168,48.683 6.344,48.858 16.747,48.858 16.923,48.683 16.923,44.629 16.752,44.458 ; U1.21@6.227,27.584 7.345,26.466 ; pad.@6.465,1.101 6.465,2.828 6.742,3.104 M1.9@8.008,3.104 ; M1.7@8.339,5.557 8.339,3.435 M1.9@8.008,3.104 ; M1.11@10.339,3.107 10.239,3.207 M1.5@10.239,5.982 10.239,7.512 9.64,8.111 pad.@9.64,10.665 9.64,12.71 10.172,13.242 17.692,13.242 18.632,14.182 v1(18.632,17.23) ; U1.5@11.53,21.15 12.154,20.525 13.033,20.525 13.727,21.22 ; U2.13@12.129,42.515 12.129,43.47 11.954,43.646 9.156,43.646 8.98,43.47 8.98,41.461 ; M1.6@14.739,5.557 14.739,3.433 M1.8@15.068,3.104 ; Y1.2@15.482,19.846 15.482,21.243 ; C1.2@16.388,28.329 18.124,28.329 18.81,27.644 18.81,23.374 17.778,22.342 EN.1@17.728,22.342 ; pad.@17.971,19.897 17.728,20.114 EN.1@17.728,22.342 ; pad.@17.971,20.049 v1(18.175,20.252) ; C3.2@19.267,3.7 C2.2@17.387,3.7 17.387,2.802 17.189,2.604 15.568,2.604 M1.8@15.068,3.104 ; pad.@22.493,40.767 17.243,40.767 16.905,41.106 16.905,44.306 16.752,44.458 ; 7.345,26.466 9.025,28.146 9.025,29.543 9.259,29.777 9.259,33.74 10.072,34.552 10.783,34.552 11.596,35.365 11.596,38.845 9.285,41.156 8.98,41.461 ; 7.345,26.466 10.612,23.199 11.744,23.199 U1.3@12.661,22.281 12.666,22.281 13.727,21.22 ; M1.9@8.008,3.104 M1.8@15.068,3.104 ; 8.98,41.461 7.981,41.461 7.805,41.637 7.805,44.224 8.04,44.458 11.266,44.458 11.85,45.043 12.942,46.135 14.722,46.135 14.898,45.959 14.898,44.634 15.074,44.458 16.752,44.458 ; 13.727,21.22 13.75,21.243 15.482,21.243 ; 15.482,21.243 16.582,22.342 EN.1@17.728,22.342
LATCH: pad.@0.405,46.767 pad.@22.693,46.767 U1.27 U2.12 | length 43.5
  Bottom Layer w0.2: pad.@0.605,47.133 0.705,47.233 0.963,47.233 1.08,47.35 1.08,49.513 1.842,50.275 20.562,50.275 21.019,49.818 21.019,47.125 21.378,46.767 pad.@22.493,46.767 ; U2.12@10.859,42.515 10.859,40.801 12.912,38.748 12.912,30.098 U1.27@10.964,28.15
  other v1: 0.391,46.767
NetC2_1: C2.1 C3.1 DIO1.1 M1.1 | length 14.2
  Bottom Layer w0.2: 14.898,8.523 DIO1.1@14.898,10.651
  Bottom Layer w0.3: M1.1@12.839,5.982 12.839,6.632 13.429,7.222 14.888,7.222 ; 14.898,8.523 14.898,7.232 14.888,7.222 ; C2.1@17.387,5.46 17.387,6.79 16.955,7.222 ; C3.1@19.267,5.46 19.267,6.841 18.886,7.222 16.955,7.222 ; 14.888,7.222 16.955,7.222
NetF1_2: F1.2 R9.2 | length 3.2
  Bottom Layer w0.2: R9.2@9.213,45.23 10.057,45.23 10.267,45.441 F1.2@10.267,47.471
NetF2_2: F2.2 R9.1 R10.1 U1.22 | length 36.8
  Bottom Layer w0.1: 7.218,44.398 7.505,44.111 7.505,41.399 7.799,41.106 8.827,41.106 11.273,38.66 11.273,36.904 11.273,35.576 11.094,35.397 ; 8.675,28.736 8.675,29.523
  Bottom Layer w0.2: U1.22@6.792,28.15 7.4,27.542 7.888,27.542 8.675,28.329 8.675,28.736 ; 7.218,44.398 7.218,45.23 7.235,45.247 7.235,45.888 7.532,46.186 8.751,46.186 9.026,46.46 9.026,48.289 9.245,48.508 12.601,48.508 12.823,48.286 12.823,48.212 ; 8.675,29.523 8.675,29.701 8.878,29.904 8.878,34.019 9.793,34.933 10.631,34.933 11.094,35.397 ; F2.2@12.822,47.451 15.512,47.451 15.873,47.091 15.873,46.453 15.877,46.448 R10.1@15.877,45.23
NetR2_2: R2.2 U2.1 | length 9.2
  Bottom Layer w0.2: U2.1@15.939,37.613 15.939,36.28 16.219,36 20.689,36 21.182,35.508 R2.2@21.182,33.16
NetR3_2: R3.2 U2.2 | length 7.2
  Bottom Layer w0.2: U2.2@14.669,37.613 14.669,35.899 15.076,35.492 17.438,35.492 17.885,35.045 R3.2@17.885,33.16
NetR4_2: R4.2 U2.3 | length 4.9
  Bottom Layer w0.2: U2.3@13.399,37.613 13.399,35.594 14.588,34.405 R4.2@14.588,33.16
NetR5_2: R5.2 U2.4 | length 4.8
  Bottom Layer w0.2: R5.2@11.291,33.16 11.291,34.4 12.129,35.238 U2.4@12.129,37.613
NetR6_2: R6.2 U2.5 | length 6.9
  Bottom Layer w0.2: R6.2@7.796,33.16 7.796,34.537 8.497,35.238 10.478,35.238 10.859,35.619 U2.5@10.859,37.613
NetR7_2: R7.2 U2.6 | length 8.9
  Bottom Layer w0.2: R7.2@4.697,33.16 4.697,35.172 5.119,35.594 9.259,35.594 9.589,35.924 U2.6@9.589,37.613
NetR8_2: R8.2 U2.7 | length 9.7
  Bottom Layer w0.2: R8.2@2.564,33.16 2.564,35.629 2.884,35.949 7.811,35.949 8.319,36.457 U2.7@8.319,37.613
NetU1_7: U1.7 Y1.1 | length 4.9
  Bottom Layer w0.3: U1.7@10.399,20.018 11.282,19.135 14.232,19.135 14.282,19.185 Y1.1@14.282,19.846
NetU1_8: U1.8 Y1.3 | length 8.7
  Bottom Layer w0.3: U1.8@9.833,19.453 10.938,18.347 16.502,18.347 16.682,18.527 Y1.3@16.682,19.846
OUT_1: pad.@22.693,49.767 U2.9 | length 26.5
  Top Layer w0.2: v1(16.473,49.462) 17.032,50.021 v1(21.553,50.021)
  Bottom Layer w0.2: U2.9@7.049,42.515 5.538,42.515 4.967,43.087 4.967,49.091 5.338,49.462 v1(16.473,49.462) ; v1(21.553,50.021) 22.439,50.021 pad.@22.693,49.767
R1: D1.2 D2.2 D3.2 D4.2 D5.2 D6.2 D7.2 pad.@0.405,48.267 pad.@22.693,48.267 U1.25 | length 50.3
  Top Layer w0.1: D1.2@2.356,49.028 2.992,49.028 3.321,49.357 4.69,49.357 5.019,49.028 D2.2@5.656,49.028 6.292,49.028 6.621,49.357 7.99,49.357 8.319,49.028 D3.2@8.956,49.028 9.592,49.028 9.921,49.357 11.29,49.357 11.619,49.028 D4.2@12.256,49.028 12.892,49.028 13.221,49.357 14.59,49.357 14.919,49.028 D5.2@15.556,49.028 15.586,49.028 16.05,48.564 16.231,48.564 17.025,49.357 17.89,49.357 18.219,49.028 D6.2@18.856,49.028 19.492,49.028 19.821,49.357 21.19,49.357 21.519,49.028 D7.2@22.156,49.028
  Top Layer w0.2: v1(0.42,48.573) 1.03,48.573 1.207,48.751 v1(1.969,48.751) ; D1.2@2.078,48.751 D1.2@2.356,49.028 ; v1(9.869,33.409) 9.869,34.832 10.275,35.238 v1(10.275,36.254)
  Top Layer w0.3: D7.2@22.156,49.028 22.156,48.804 v1(22.693,48.267)
  Bottom Layer w0.2: pad.@0.405,48.267 0.405,48.558 v1(0.42,48.573) ; v1(1.969,48.751) 2.757,47.964 2.757,43.646 5.551,40.852 8.624,40.852 10.275,39.201 v1(10.275,36.254) ; U1.25@9.833,29.281 9.973,29.421 9.973,29.65 9.68,29.942 9.68,32.088 9.869,32.276 v1(9.869,33.409)